# EAGLE board board (EAGLE 9.6.2)
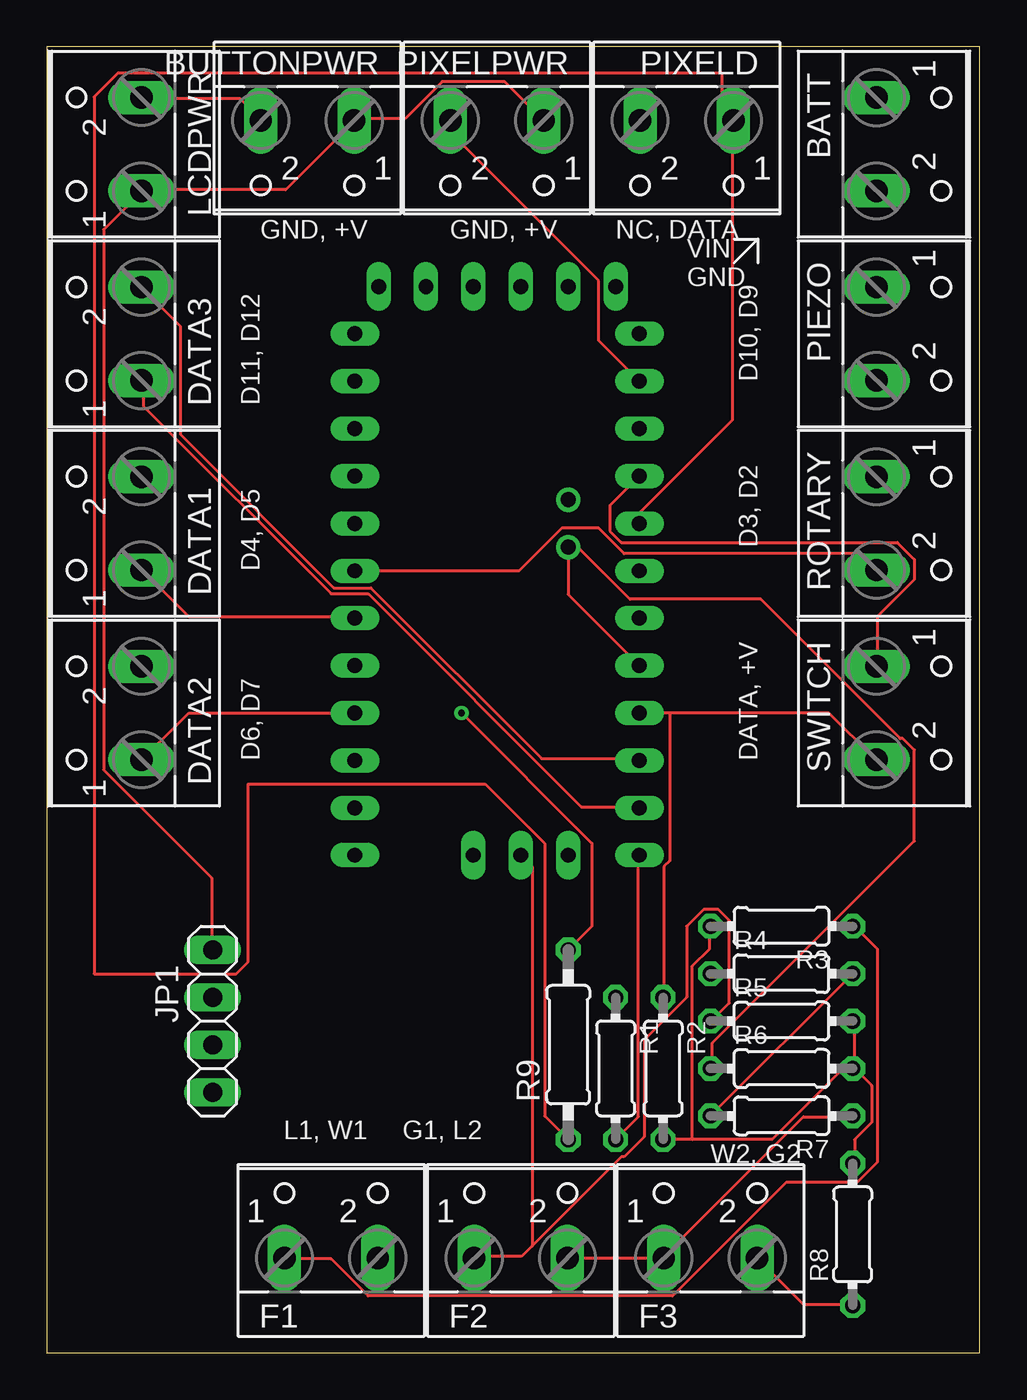
[diagram p0: board, top side]
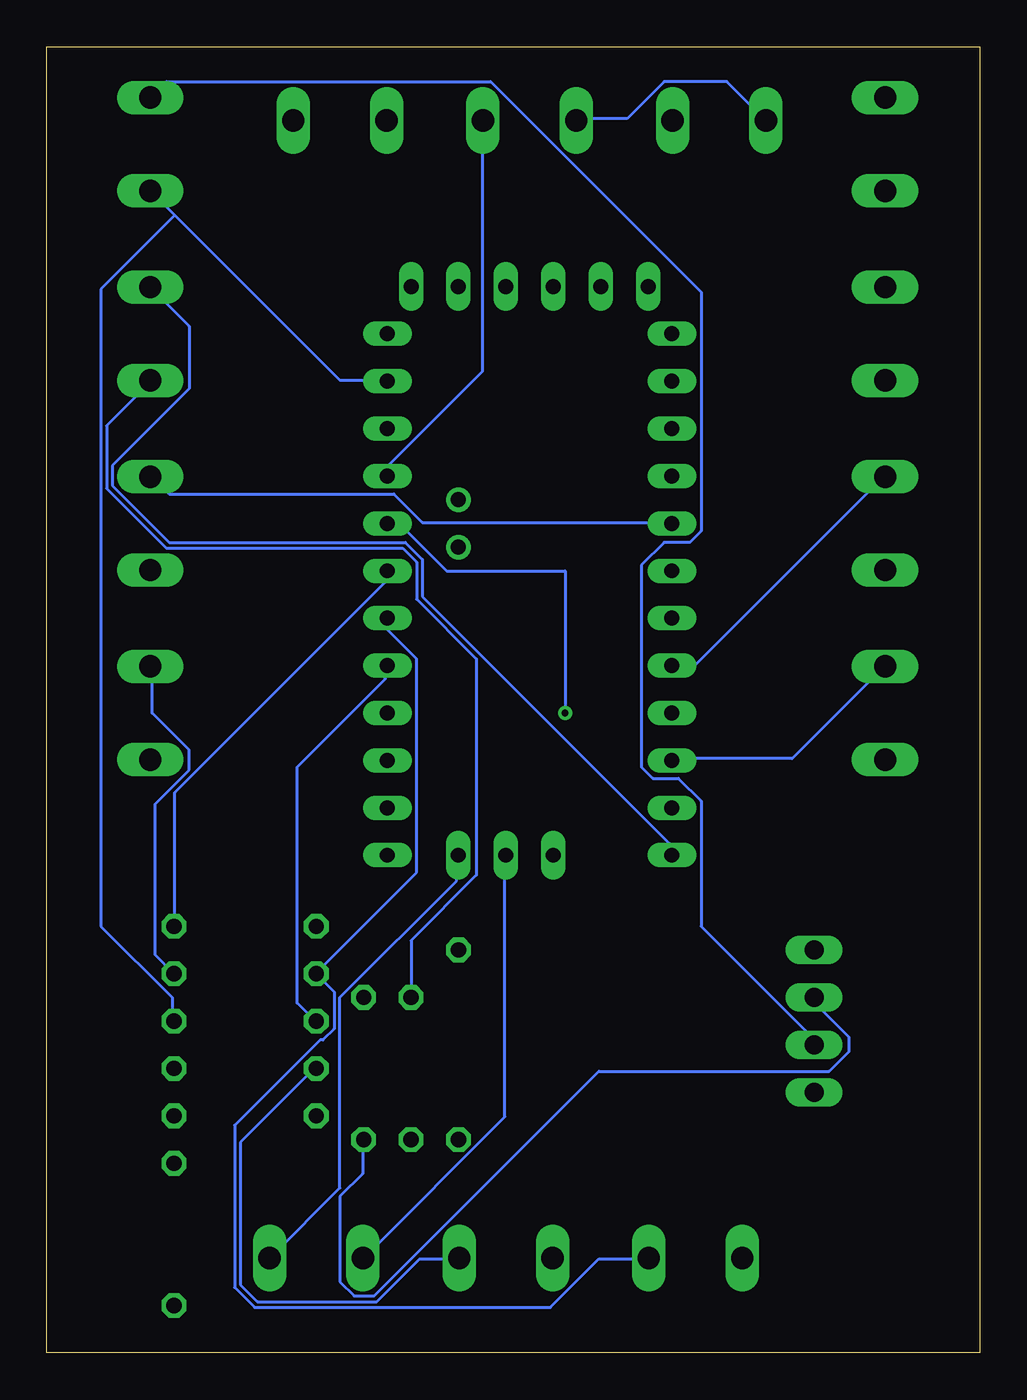
[diagram p1: board, bottom side, seen from below]

Size 50 x 70 mm. Coordinates in mm from the lower left corner, seen from the top.
Outline: 0,0 50,0 50,70 0,70 0,0
Copper layers (1*16): Top 0.035mm / dielectric 1.5mm / Bottom 0.035mm
Design rules "default": minimum track width 6mil, minimum drill 0.35mm, track to track 6mil, track to pad 6mil, pad to pad 6mil, via to via 6mil, smd to smd 6mil, copper to edge 40mil, drill to drill 6mil, minimum pad ring 10mil, minimum via ring 8mil, stop-mask expansion 4mil, vias tented up to drill 0mil, thermal gap 10mil

## Footprints (pad centres in the part's own frame; a part is rotated, then mirrored left to right if it is on the bottom)
W237-102 = drill 1.194 long: 1 -2.5,-1.27; 2 2.5,-1.27
1X04 = drill 1.016 long: 1 -3.81,0; 2 -1.27,0; 3 1.27,0; 4 3.81,0
0204/7 = drill 0.813 octagon: 1 -3.81,0; 2 3.81,0
0207/10 = drill 0.813 octagon: 1 -5.08,0; 2 5.08,0
ABK-PRO-MINI = drill 0.8 long: A0 10.16,-3.81; A1 10.16,-6.35; A2 10.16,-8.89; A3 10.16,-11.43; A6 3.81,-21.59; A7 6.35,-21.59; D2 -5.08,-3.81; D3 -5.08,-6.35; D4 -5.08,-8.89; D5 -5.08,-11.43; D6 -5.08,-13.97; D7 -5.08,-16.51; D8 -5.08,-19.05; D9 -5.08,-21.59; D10 10.16,-21.59; D11 10.16,-19.05; D12 10.16,-16.51; D13 10.16,-13.97; DTR 8.89,8.89; GND 10.16,3.81; GND1 -5.08,-1.27; GND2 -3.81,8.89; GND3 -1.27,8.89; GND4 1.27,-21.59; RAW 10.16,6.35; RST 10.16,1.27; RST1 -5.08,1.27; RX1 -5.08,3.81; RX1-1 3.81,8.89; TX0 -5.08,6.35; TX0-1 6.35,8.89; VCC 10.16,-1.27; VCC1 1.27,8.89 | drill 0.8: A4 6.35,-5.08; A5 6.35,-2.54

## Placement (x,y rotation side)
BATT  [W237-102]  45.72,64.77 270 top
BUTTONPWR  [W237-102]  13.97,64.77 180 top
DATA1  [W237-102]  3.81,44.45 90 top
DATA2  [W237-102]  3.81,34.29 90 top
DATA3  [W237-102]  3.81,54.61 90 top
F1  [W237-102]  15.24,6.35 0 top
F2  [W237-102]  25.4,6.35 0 top
F3  [W237-102]  35.56,6.35 0 top
JP1  [1X04]  8.89,17.78 90 top
LCDPWR  [W237-102]  3.81,64.77 90 top
PIEZO  [W237-102]  45.72,54.61 270 top
PIXELD  [W237-102]  34.29,64.77 180 top
PIXELPWR  [W237-102]  24.13,64.77 180 top
R1  330  [0204/7]  30.48,15.24 270 top
R2  1000  [0204/7]  33.02,15.24 270 top
R3  1000  [0204/7]  39.37,22.86 180 top
R4  1300  [0204/7]  39.37,20.32 0 top
R5  1000  [0204/7]  39.37,17.78 0 top
R6  1000  [0204/7]  39.37,15.24 0 top
R7  1300  [0204/7]  39.37,12.7 180 top
R8  1000  [0204/7]  43.18,6.35 90 top
R9  330  [0207/10]  27.94,16.51 90 top
ROTARY  [W237-102]  45.72,44.45 270 top
SWITCH  [W237-102]  45.72,34.29 270 top
U$1  ABK-PRO-MINI  [ABK-PRO-MINI]  21.59,48.26 0 top

## Library data of the parts
BATT BUTTONPWR DATA1-DATA3 F1-F3 LCDPWR PIEZO PIXELD PIXELPWR ROTARY SWITCH = con-wago-500; MPN: 237-102; OC_FARNELL: unknown; OC_NEWARK: 70K9898
JP1 = pinhead
R1-R9 = rcl; SPICEPREFIX: R
U$1 = Arduino-clone

## Nets
N$1: BUTTONPWR.1 JP1.4 LCDPWR.1 PIXELPWR.1 R4.2 R7.2 SWITCH.1 U$1.VCC
N$2: BATT.2 BUTTONPWR.2 JP1.3 LCDPWR.2 PIXELPWR.2 R2.2 R3.2 R5.2 R6.2 R8.2 U$1.GND
N$3: BATT.1 JP1.2
N$4: DATA2.1 U$1.D6
N$5: DATA3.1 U$1.D11
N$6: DATA3.2 U$1.D12
N$7: DATA1.1 U$1.D4
N$8: DATA1.2 U$1.D5
N$9: DATA2.2 U$1.D7
N$10: PIEZO.1 U$1.D9
N$11: PIEZO.2 R1.1
N$12: R1.2 U$1.D10
N$13: ROTARY.1 U$1.D2
N$14: ROTARY.2 U$1.D3
N$15: F1.1 R3.1 U$1.A1
N$16: R2.1 SWITCH.2 U$1.D13
N$17: R9.2 U$1.A0
N$18: F1.2 R4.1 U$1.A2
N$19: F2.1 R5.1 U$1.A6
N$20: F2.2 F3.1 R6.1 R7.1 U$1.A3 U$1.A4
N$22: F3.2 R8.1 U$1.A7
N$23: PIXELD.1 R9.1

## Tracks (layer width: path | path; a pad name or v marks a point on that pad's centre or on a via)
N$1
  Top 0.152: JP1.4 8.84,21.64 8.84,25.45 3.05,31.24 3.05,60.2 5.03,62.18 LCDPWR.1 5.18,62.33 12.8,62.33 16.46,65.99 BUTTONPWR.1 16.61,66.14 19.2,66.14 21.18,68.12 24.54,68.12 26.52,66.14 PIXELPWR.1 | R4.2 R7.2 | U$1.VCC 30.18,45.41 30.18,44.04 30.79,43.43 45.57,43.43 46.48,42.52 46.48,41.45 44.5,39.47 44.5,36.88 SWITCH.1
  Bottom 0.152: R4.2 44.2,21.34 44.2,29.41 42.37,31.24 42.37,32.31 44.35,34.29 44.35,36.73 SWITCH.1 | U$1.VCC 31.7,47.09 31.7,47.55 26.67,52.58 26.67,65.99 PIXELPWR.1
N$2
  Top 0.152: 34.59,11.43 38.86,11.43 42.67,15.24 R6.2 43.28,15.24 | 34.59,11.43 R2.2 | 34.59,11.43 34.59,20.73 35.51,21.64 35.51,22.86 R3.2 | 43.28,15.24 44.2,14.33 44.2,12.34 43.28,11.43 43.28,10.21 R8.2 | 43.28,15.24 43.28,17.68 R5.2 | LCDPWR.2 5.18,67.21 10.36,67.21 11.43,66.14 BUTTONPWR.2 | U$1.GND 29.57,54.25 29.57,57.45 21.64,65.38 21.64,65.99 PIXELPWR.2
  Bottom 0.152: JP1.3 8.84,19.05 8.84,18.75 7.01,16.92 7.01,16.15 8.08,15.09 20.42,15.09 32.46,3.05 33.53,3.05 34.29,3.81 34.29,8.38 33.07,9.6 33.07,11.43 R2.2 | PIXELPWR.2 21.49,66.14 18.9,66.14 16.92,68.12 13.56,68.12 11.58,66.14 BUTTONPWR.2 | 43.13,60.96 44.35,62.18 BATT.2 | 43.13,60.96 34.29,52.12 31.85,52.12 U$1.GND | 43.13,60.96 47.09,57 47.09,22.86 43.28,19.05 43.28,17.83 R5.2
N$3
  Bottom 0.152: JP1.2 8.99,16.61 8.99,16.92 14.94,22.86 14.94,29.57 16.15,30.79 17.53,30.79 18.14,31.39 18.14,42.22 16.92,43.43 15.54,43.43 14.94,44.04 14.94,56.84 26.21,68.12 43.59,68.12 44.35,67.36 BATT.1
N$4
  Top 0.152: U$1.D6 7.62,34.29 5.18,31.85 DATA2.1
N$5
  Top 0.152: U$1.D11 31.7,29.26 28.65,29.26 17.22,40.69 15.24,40.69 5.18,50.75 5.18,51.97 DATA3.1
N$6
  Top 0.152: U$1.D12 31.7,31.85 26.52,31.85 17.37,41 15.39,41 7.16,49.23 7.16,55.02 5.18,57 DATA3.2
N$7
  Top 0.152: U$1.D4 16.46,39.47 7.62,39.47 5.18,41.91 DATA1.1
N$8
  Bottom 0.152: U$1.D5 16.46,36.88 15.24,36.88 5.18,46.94 DATA1.2
N$9
  Bottom 0.152: U$1.D7 16.46,31.85 10.06,31.85 5.18,36.73 DATA2.2
N$10
  Bottom 0.152: U$1.D9 16.61,26.67 16.61,27.28 29.87,40.54 29.87,42.52 30.79,43.43 43.43,43.43 46.48,46.48 46.48,47.55 42.37,51.66 42.37,55.02 44.35,57 PIEZO.1
N$11
  Bottom 0.152: R1.1 30.48,22.1 26.98,25.6 26.98,37.19 30.18,40.39 30.18,42.37 30.94,43.13 43.59,43.13 46.79,46.33 46.79,49.68 44.5,51.97 PIEZO.2
N$12
  Top 0.152: R1.2 31.7,12.65 31.7,26.67 U$1.D10
N$13
  Bottom 0.152: U$1.D2 16.61,44.5 29.87,44.5 31.39,46.02 43.43,46.02 44.35,46.94 ROTARY.1
N$14
  Top 0.152: U$1.D3 25.3,41.91 27.58,44.2 29.57,44.2 30.94,42.82 43.59,42.82 44.35,42.06 ROTARY.2
N$15
  Top 0.152: F1.1 12.8,5.03 15.24,5.03 17.22,3.05 33.53,3.05 39.62,9.14 43.43,9.14 44.5,10.21 44.5,21.64 43.28,22.86 R3.1
  Bottom 0.152: U$1.A1 31.85,41.91 31.85,41.3 43.13,30.02 43.13,22.86 R3.1
N$16
  Top 0.152: 33.38,34.29 41.91,34.29 44.35,31.85 SWITCH.2 | 33.38,34.29 U$1.D13 | 33.38,34.29 33.38,26.36 33.07,26.06 33.07,19.05 R2.1
N$17  (via drill 0.35)
  Top 0.152: 36.73,65.99 36.73,49.99 31.85,45.11 31.85,44.5 U$1.A0 | R9.2 29.21,22.86 29.21,27.3 v22.23,34.29
  Bottom 0.152: v22.23,34.29 22.23,41.91 28.57,41.91 31.11,44.45 U$1.A0
N$18
  Bottom 0.152: U$1.A2 31.7,39.32 31.7,38.71 30.18,37.19 30.18,25.76 35.51,20.42 R4.1 34.59,19.36 34.59,17.37 35.2,16.76 35.36,16.76 39.93,12.19 39.93,3.5 38.86,2.44 23.01,2.44 20.42,5.03 17.83,5.03 F1.2
N$19
  Top 0.152: 26.01,5.74 30.79,10.52 30.94,10.52 32,11.58 32,16.76 34.29,19.05 34.29,22.86 35.2,23.77 35.97,23.77 36.58,23.16 36.58,18.75 35.66,17.83 R5.1 | 26.01,5.74 25.45,5.18 23.01,5.18 F2.1 | U$1.A6 26.04,26.04 26.04,5.71 26.01,5.74
  Bottom 0.152: 31.85,36.73 31.85,36.12 36.58,31.39 36.58,18.75 35.66,17.83 R5.1
N$20
  Top 0.152: R6.1 35.66,15.24 35.66,16.61 46.48,27.43 46.48,32.31 45.87,32.92 45.72,32.92 38.25,40.39 31.24,40.39 28.5,43.13 28.04,43.13 U$1.A4 27.94,40.64 U$1.A3 | R7.1 43.13,12.65 40.54,12.65 33.07,5.18 F3.1 F2.2
  Bottom 0.152: F2.2 28.04,5.03 30.02,5.03 32.31,2.74 38.71,2.74 39.62,3.66 39.62,11.28 35.66,15.24 R6.1 | 25.45,26.67 25.45,12.65 32.92,5.18 F3.1
N$22
  Top 0.152: R8.1 43.13,2.59 40.54,2.59 38.1,5.03 F3.2
  Bottom 0.152: U$1.A7 28.04,26.67 28.04,25.3 34.29,19.05 34.29,8.84 37.95,5.18 F3.2
N$23
  Top 0.152: R9.1 26.67,12.7 26.67,27.3 23.5,30.48 10.79,30.48 10.79,20.95 10.16,20.32 2.54,20.32 2.54,67.31 3.81,68.58 36.2,68.58 36.2,66.04 PIXELD.1

## Text on the board
tNames: GND, +V | GND, +V | NC, DATA | VIN / GND | D10, D9 | D11, D12 | D3, D2 | D4, D5 | D6, D7 | DATA, +V | L1, W1 | G1, L2 | W2, G2